# EAGLE board Pro_Micro_4x4_Multiplexer_v3 (EAGLE 9.7.0)
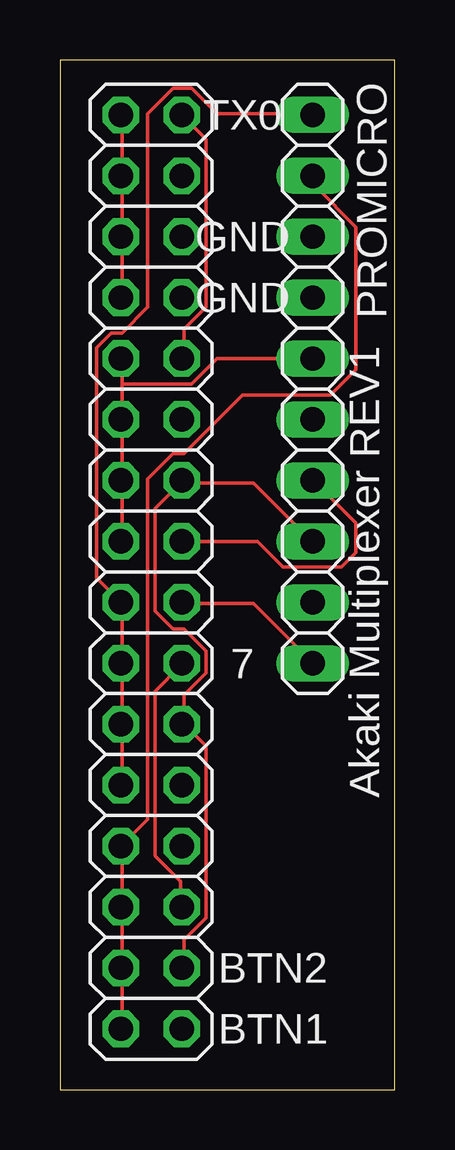
[diagram p0: board, top side]
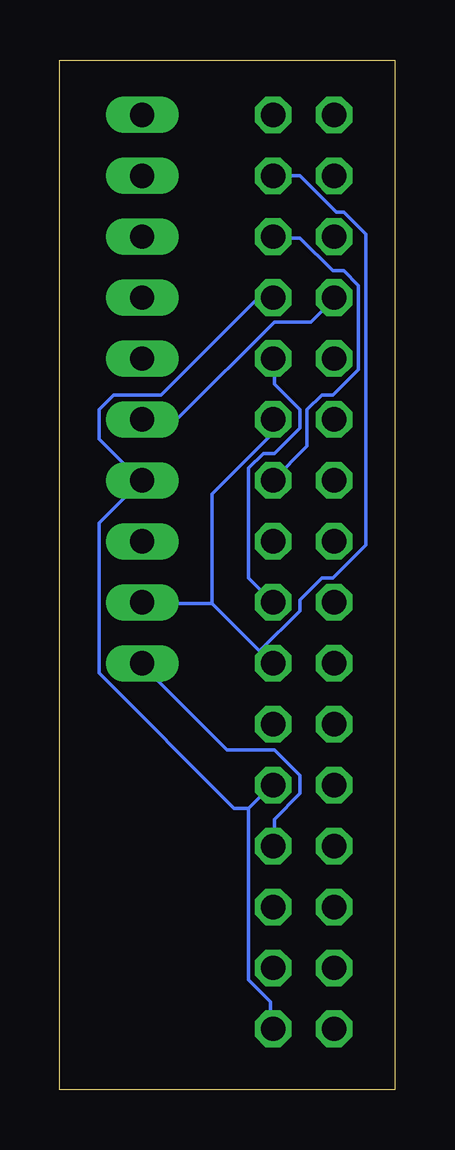
[diagram p1: board, bottom side, seen from below]

Size 13.97 x 42.93 mm. Coordinates in mm from the lower left corner, seen from the top.
Outline: 0,0 13.97,0 13.97,42.93 0,42.93 0,0
Copper layers (1*16): Top 0.035mm / dielectric 1.5mm / Bottom 0.035mm
Design rules "default *": minimum track width 6mil, minimum drill 0.35mm, track to track 6mil, track to pad 6mil, pad to pad 6mil, via to via 6mil, smd to smd 6mil, copper to edge 40mil, drill to drill 6mil, minimum pad ring 10mil, minimum via ring 8mil, stop-mask expansion 4mil, vias tented up to drill 0mil, thermal gap 10mil

## Footprints (pad centres in the part's own frame; a part is rotated, then mirrored left to right if it is on the bottom)
2X08 = drill 1.016 octagon: 1 -8.89,-1.27; 2 -8.89,1.27; 3 -6.35,-1.27; 4 -6.35,1.27; 5 -3.81,-1.27; 6 -3.81,1.27; 7 -1.27,-1.27; 8 -1.27,1.27; 9 1.27,-1.27; 10 1.27,1.27; 11 3.81,-1.27; 12 3.81,1.27; 13 6.35,-1.27; 14 6.35,1.27; 15 8.89,-1.27; 16 8.89,1.27
1X10 = drill 1.016 long: 1 -11.43,0; 2 -8.89,0; 3 -6.35,0; 4 -3.81,0; 5 -1.27,0; 6 1.27,0; 7 3.81,0; 8 6.35,0; 9 8.89,0; 10 11.43,0

## Placement (x,y rotation side)
BUTTONS1  PINHD-2X8  [2X08]  3.81,11.43 90 top
BUTTONS2  PINHD-2X8  [2X08]  3.81,31.75 90 top
PROMICRO  PINHD-1X10  [1X10]  10.54,29.21 270 top

## Library data of the parts
BUTTONS1 BUTTONS2 PROMICRO = Connector; CATEGORY: CONNECTOR; SUB-CATEGORY: PIN-HEADER

## Nets
N$1: BUTTONS1.2 BUTTONS1.4 BUTTONS1.6 BUTTONS1.8 PROMICRO.2
N$3: BUTTONS2.2 BUTTONS2.4 BUTTONS2.6 BUTTONS2.8 PROMICRO.5
N$4: BUTTONS2.10 BUTTONS2.12 BUTTONS2.14 BUTTONS2.16 PROMICRO.6
N$6: BUTTONS1.1 BUTTONS1.9 BUTTONS2.1 BUTTONS2.9 PROMICRO.7
N$7: BUTTONS1.3 BUTTONS1.11 BUTTONS2.3 BUTTONS2.11 PROMICRO.8
N$8: BUTTONS1.5 BUTTONS1.13 BUTTONS2.5 BUTTONS2.13 PROMICRO.9
N$9: BUTTONS1.7 BUTTONS1.15 BUTTONS2.7 BUTTONS2.15 PROMICRO.10
TX0: BUTTONS1.10 BUTTONS1.12 BUTTONS1.14 BUTTONS1.16 PROMICRO.1

## Tracks (layer width: path | path; a pad name or v marks a point on that pad's centre or on a via)
N$1
  Top 0.152: BUTTONS1.2 2.59,2.59 2.59,5.03 BUTTONS1.4 2.59,5.18 2.59,7.62 | 2.59,7.62 2.59,10.06 BUTTONS1.8 3.66,11.28 3.66,25.45 4.72,26.52 5.18,26.52 7.62,28.96 11.28,28.96 12.34,30.02 12.34,35.97 10.67,37.64 10.67,38.1 PROMICRO.2 | 2.59,7.62 BUTTONS1.6
N$3
  Top 0.152: BUTTONS2.2 2.59,22.86 2.59,25.3 BUTTONS2.4 2.59,25.45 2.59,27.89 BUTTONS2.6 2.59,28.04 2.59,29.41 | 2.59,29.41 2.59,30.48 BUTTONS2.8 | PROMICRO.5 6.55,30.48 5.49,29.41 2.59,29.41
N$4
  Top 0.152: 2.59,38.1 2.59,40.54 BUTTONS2.16 | BUTTONS2.10 2.59,33.07 2.59,35.51 BUTTONS2.12 2.59,35.66 2.59,38.1 | 2.59,38.1 BUTTONS2.14
  Bottom 0.152: PROMICRO.6 10.52,28.04 8.99,28.04 5.03,32 3.5,32 2.59,32.92 BUTTONS2.10
N$6
  Top 0.152: BUTTONS2.1 8.23,22.86 9.3,21.79 11.73,21.79 12.34,22.4 12.34,23.62 10.67,25.3 PROMICRO.7
  Bottom 0.152: 6.1,11.73 6.1,4.57 5.18,3.66 5.18,2.59 BUTTONS1.1 | 6.1,11.73 5.18,12.65 BUTTONS1.9 | BUTTONS2.9 5.18,32.92 5.79,32.92 9.75,28.96 11.73,28.96 12.34,28.35 12.34,27.13 10.67,25.45 PROMICRO.7 10.67,25.3 12.34,23.62 12.34,17.37 6.71,11.73 6.1,11.73
N$7
  Top 0.152: 5.18,15.24 6.1,14.33 6.1,7.16 5.18,6.25 5.18,5.18 BUTTONS1.3 | PROMICRO.8 10.52,22.86 8.08,25.3 5.18,25.3 BUTTONS2.3 5.03,25.3 3.96,24.23 3.96,19.96 4.72,19.2 5.18,19.2 6.1,18.29 6.1,17.37 5.18,16.46 5.18,15.24 | 5.18,15.24 BUTTONS1.11
  Bottom 0.152: BUTTONS2.3 3.66,26.82 3.66,28.35 3.05,28.96 2.59,28.96 1.52,30.02 1.52,33.53 2.13,34.14 2.59,34.14 3.96,35.51 5.03,35.51 BUTTONS2.11
N$8
  Top 0.152: BUTTONS1.5 5.03,7.62 5.03,8.69 3.96,9.75 3.96,16.61 5.03,17.68 BUTTONS1.13
  Bottom 0.152: 7.62,20.27 10.52,20.27 PROMICRO.9 | 5.64,18.29 5.18,17.83 BUTTONS1.13 5.64,18.29 | 5.64,18.29 7.62,20.27 | 7.62,20.27 7.62,24.84 5.18,27.28 5.18,27.89 BUTTONS2.5 | BUTTONS2.13 3.96,38.1 2.44,36.58 2.13,36.58 1.22,35.66 1.22,22.71 2.59,21.34 3.05,21.34 3.96,20.42 3.96,19.96 5.64,18.29
N$9
  Top 0.152: BUTTONS2.15 6.1,39.62 6.1,32.61 5.18,31.7 5.18,30.48 BUTTONS2.7 | BUTTONS1.15 5.18,20.27 8.08,20.27 10.52,17.83 PROMICRO.10
  Bottom 0.152: BUTTONS1.7 5.03,10.21 5.03,11.28 3.96,12.34 3.96,13.11 5.03,14.17 7.01,14.17 10.52,17.68 PROMICRO.10 | BUTTONS1.15 6.1,21.34 6.1,25.91 5.49,26.52 5.03,26.52 3.96,27.58 3.96,28.35 5.03,29.41 5.03,30.48 BUTTONS2.7
TX0
  Top 0.152: 2.59,15.24 2.59,12.8 BUTTONS1.10 | PROMICRO.1 10.52,40.69 6.55,40.69 5.49,41.76 4.72,41.76 3.66,40.69 3.66,32.61 2.59,31.55 2.13,31.55 1.52,30.94 1.52,21.34 BUTTONS1.16 2.59,20.27 2.59,17.83 BUTTONS1.14 2.59,17.68 2.59,15.24 | 2.59,15.24 BUTTONS1.12

## Text on the board
tNames: TX0 | GND | GND | Akaki Multiplexer REV1 | 7 | BTN2 | BTN1